# Altium PCB PCB1.PcbDoc
Units mm, origin at the board's own origin, x right, y up, seen from the top; angles counter-clockwise.
Board outline 100 x 50 mm, 2 copper layers (Top Layer, Bottom Layer); 22 components, 19 nets, 80 pads, 1 vias.
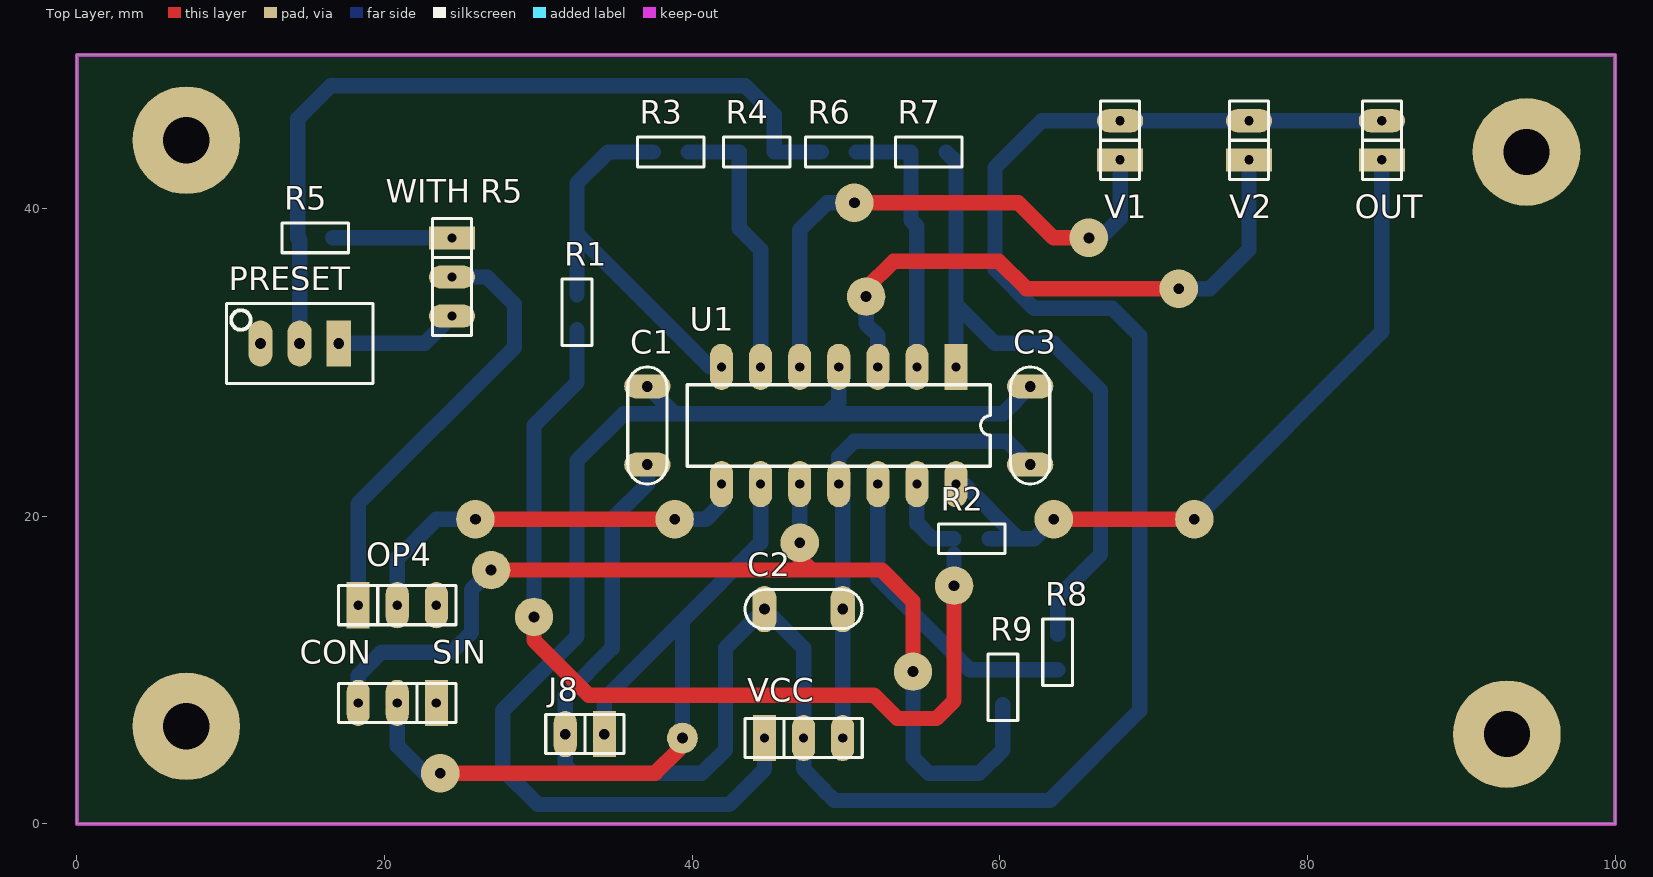
[diagram p0: Top Layer view]
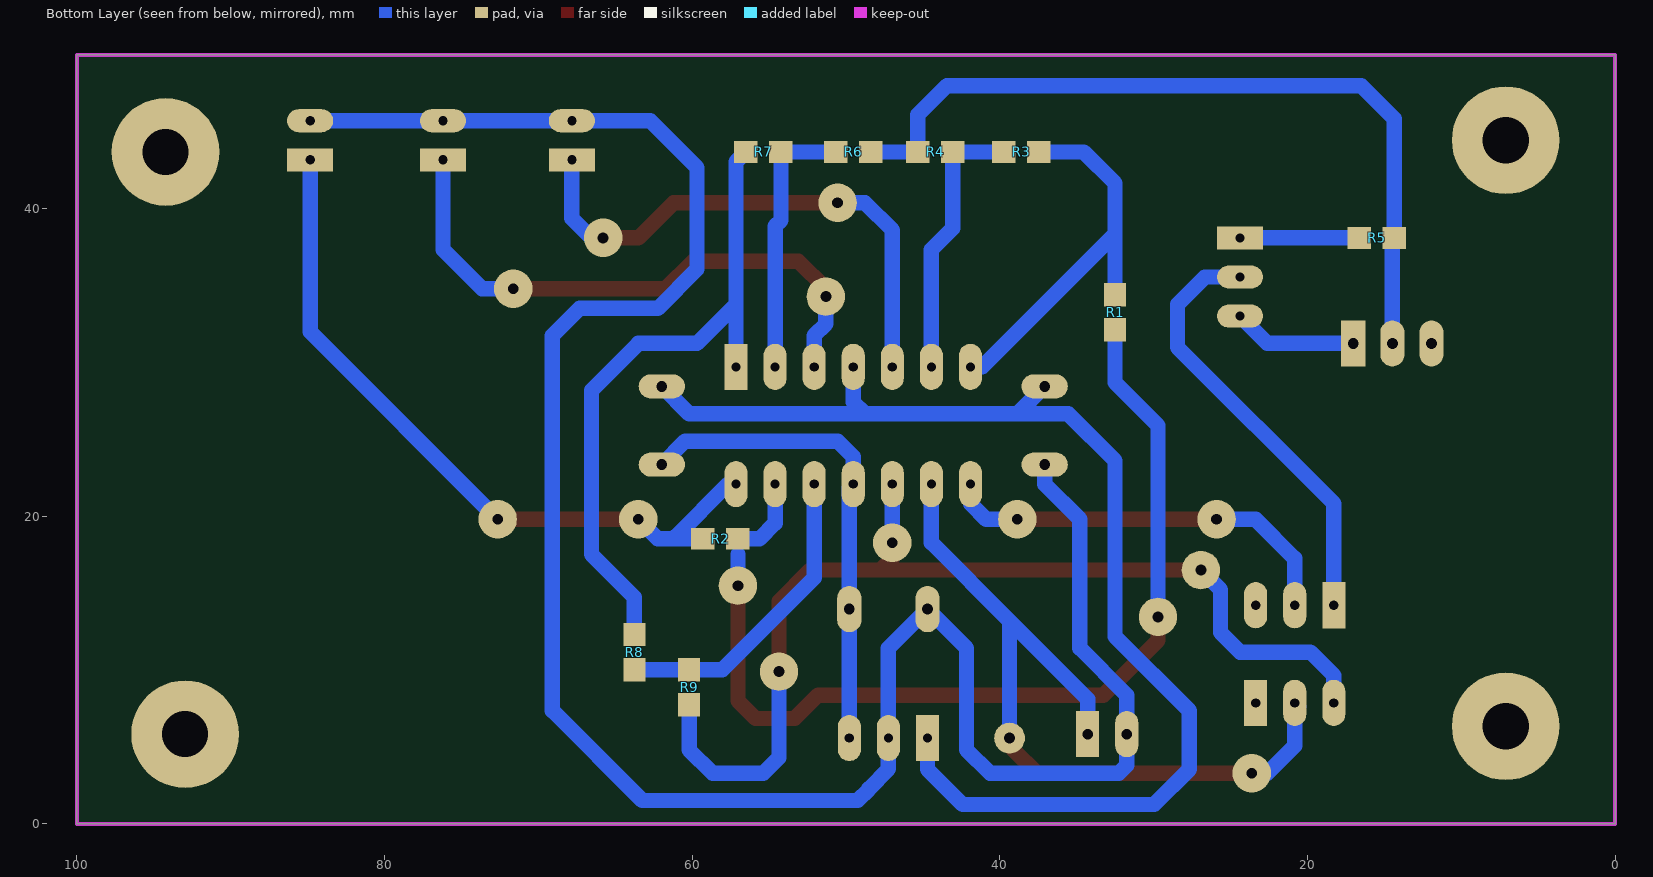
[diagram p1: Bottom Layer view, seen from below]
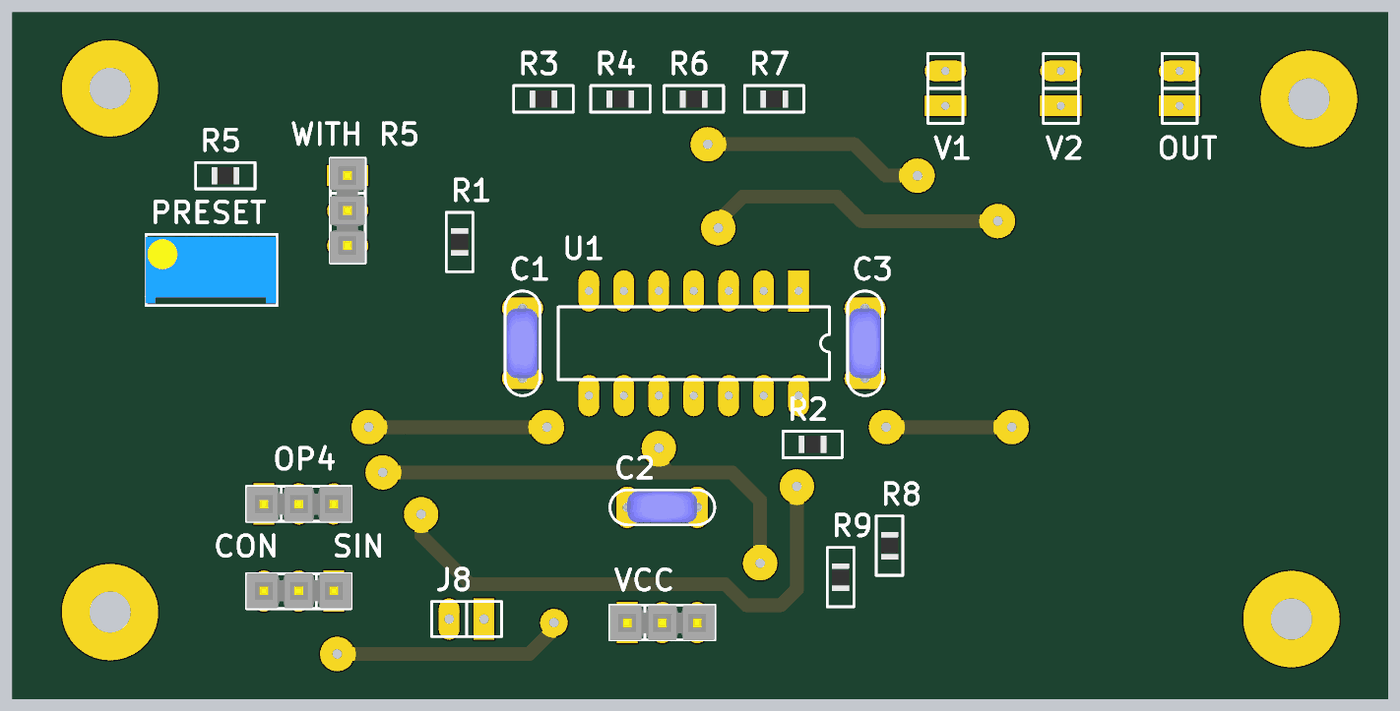
[diagram p2: 3D render of the assembled board from above, using the file's embedded part models]

## Layer stack, top to bottom
Top Solder: solder mask 0.0102, Solder Resist, Dk 3.5
Top Layer: signal copper 0.0356
Dielectric 1: dielectric 0.32, FR-4, Dk 4.8
Bottom Layer: signal copper 0.0356
Bottom Solder: solder mask 0.0102, Solder Resist, Dk 3.5

## Board outline
0,0 100,0 100,50 0,50

## Design rules (kind name [scope] priority, off if disabled: settings)
Clearance [All] p1: gap=0.254
PolygonConnect [All] p1: connectstyle=Relief reliefconductorwidth=0.254 reliefentries=4 polygonreliefangle="90 Angle" airgapwidth=0.254
RoutingVias [All] p1: holewidth=0.711 width=1.27 viastyle="Through Hole" minholewidth=0.711 minwidth=1.27 maxholewidth=0.711 maxwidth=1.27
SolderMaskExpansion [All] p1: expansion=0.102
Width [All] p1: maxlimit=1 minlimit=1 preferedwidth=1
30 further rules are at their usual default settings.

## Components (designator, comment, footprint, x,y, rotation, side; value= is the part's Value field where it differs from the comment)
C1 "CAP" CAP200 37.084,25.908 r270 top
C2 "CAP" CAP200 47.244,13.97 r180 top
C3 "CAP" CAP200 61.976,25.908 r270 top
CON "CON3" SIP3 20.828,14.224 r0 top (schematic designator J7)
J8 "CON2" SIP2#1 33.02,5.842 r180 top
OP4 "CON3" SIP3 20.828,7.874 r180 top (schematic designator J6)
OUT "CON2" SIP2#2 84.836,44.45 r90 top (schematic designator J4)
PRESET "PRESET" "PRESET V" 14.478,31.242 r180 top (schematic designator R10)
R1 "RES" 0805 32.512,33.274 r270 top
R2 "RES" 0805 58.166,18.542 r0 top
R3 "RES" 0805 38.608,43.688 r180 top
R4 "RES" 0805 44.196,43.688 r180 top
R5 "RES" 0805 15.494,38.1 r180 top
R6 "RES" 0805 49.53,43.688 r180 top
R7 "RES" 0805 55.372,43.688 r180 top
R8 "RES" 0805 63.754,11.176 r270 top
R9 "RES" 0805 60.198,8.89 r270 top
U1 "TL084ACN" 646-06 49.53,25.908 r180 top
V1 "CON2" SIP2#2 67.818,44.45 r90 top (schematic designator J2)
V2 "CON2" SIP2#2 76.2,44.45 r90 top (schematic designator J3)
VCC "CON3" SIP3 47.244,5.588 r0 top (schematic designator J1)
"WITH R5" "CON3" SIP3 24.384,35.56 r270 top (schematic designator J5)

## Footprints (in the part's own frame and the unit in brackets; to place one, negate y for a bottom-side part, rotate by r counter-clockwise, add the part's x,y. Pads: shape width x height; smd on the part's side, far side on the other; paste and mask are expansions set on the pad)
646-06 [mm] "DIP; 14 Leads; Row Spacing 7.62 mm; Pitch 2.54 mm"
  rect 1.5x3 hole 0.6: 1(-7.62,-3.81)
  oval 1.5x3 hole 0.6: 2(-5.08,-3.81) 3(-2.54,-3.81) 4(0,-3.81) 5(2.54,-3.81) 6(5.08,-3.81) 7(7.62,-3.81) 8(7.62,3.81) 9(5.08,3.81) 10(2.54,3.81) 11(0,3.81) 12(-2.54,3.81) 13(-5.08,3.81) 14(-7.62,3.81)
  silkscreen extent -9.85,-2.65 9.85,2.65
0805 [mil] "Pasivo 0805"
  rect 60x56 smd far side: 1(-45,0) 2(45,0)
  silkscreen extent -85,-38 85,38, body extent -40,-25 39,25, height 15
CAP200 [mm]
  oval 1.575x3 hole 0.7: 1(-2.54,0) 2(2.54,0)
  silkscreen extent -3.81,-1.27 3.81,1.27, body extent -2.79,-1.17 2.79,1.12, height 6.24
"PRESET V" [mm]
  rect 1.575x3 hole 0.7: 1(-2.54,0)
  oval 1.575x3 hole 0.7: 2(0,0) 3(2.54,0)
  silkscreen extent -4.76,-2.6 4.76,2.6, body extent -4.7,-2.42 4.83,2.42, height 11.55
SIP2#1 [mm]
  rect 1.5x3 hole 0.7: 1(-1.27,0)
  oval 1.5x3 hole 0.7: 2(1.27,0)
  silkscreen extent -2.54,-1.27 2.54,1.27
SIP2#2 [mm]
  rect 1.5x3 hole 0.6: 1(-1.27,0)
  oval 1.5x3 hole 0.6: 2(1.27,0)
  silkscreen extent -2.54,-1.27 2.54,1.27
SIP3 [mm]
  rect 1.5x3 hole 0.6: 1(-2.54,0)
  oval 1.5x3 hole 0.6: 2(0,0) 3(2.54,0)
  silkscreen extent -3.81,-1.27 3.81,1.27, body extent -3.81,-1.3 3.81,1.24, height 8.38

## Part data
U1: "JFET-Input Operational Amplifier"

## Free pads (board coordinates)
  round 2.5 hole 0.7: 0(50.546,40.386) 1(51.308,34.29) 2(71.628,34.798) 4(46.99,18.288) 9(63.508,19.812) 10(72.644,19.812) 13(38.862,19.812) 15(25.908,19.812) 16(25.908,19.812) 20(54.356,9.906) 22(57.023,15.494) 23(29.718,13.462) 24(26.924,16.51) 27(23.622,3.302)
  round 7 hole 3: 25(7.112,6.35) 25(7.112,44.45) 25(92.964,5.842) 25(94.234,43.688)
  round 2 hole 0.7: 26(39.37,5.588)

## Via types
v1: diameter 2.5, hole 0.711, Top Layer to Bottom Layer, 1 vias

## Nets (pads, with @x,y where several pads share a name; then routed paths per layer and width w, separated by ;. In a path a pad name is that pad's centre, name@x,y a point inside that pad or via, vN(x,y) a via of type N, cw(c..) or ccw(c..) an arc to the next point about the centre after c; other vN are vias at no path point)
+VCC: C1.1 C3.1 U1.4 VCC.1 | length 80.3
  Bottom Layer w1: C1.1 38.862,26.67 ; VCC.1 44.704,3.556 42.418,1.27 29.972,1.27 27.686,3.556 27.686,7.366 32.512,12.192 32.512,23.622 35.56,26.67 38.862,26.67 ; U1.4 49.53,27.432 48.768,26.67 ; C3.1 60.198,26.67 48.768,26.67 ; 38.862,26.67 48.768,26.67
-VCC: C2.1 C3.2 U1.11 VCC.3 | length 31.9
  Bottom Layer w1: VCC.3 C2.1 49.784,21.844 U1.11 49.53,23.876 50.546,24.892 60.452,24.892 C3.2
GND: C1.2 C2.2 J8.2 OUT.2 V1.2 V2.2 VCC.2 | length 148.4
  Bottom Layer w1: C1.2 37.084,22.098 34.798,19.812 34.798,11.43 31.75,8.382 J8.2 31.75,3.81 32.258,3.302 40.64,3.302 42.164,4.826 42.164,11.43 C2.2 47.244,11.43 VCC.2 47.244,3.587 48.514,2.286 48.514,2.254 49.244,1.524 63.246,1.524 69.088,7.366 69.088,31.75 67.31,33.528 62.23,33.528 59.69,36.068 59.69,42.672 62.738,45.72 V1.2 OUT.2
NetJ5_1: "WITH R5.1" R5.1 | length 7.7
  Bottom Layer w1: R5.1 24.384,38.1
NetJ5_3: "WITH R5.3" PRESET.1 | length 8.1
  Bottom Layer w1: PRESET.1 22.606,31.242 24.384,33.02
NetJ6_2: J8.1 OP4.2 pad.26 pad.27 U1.9 | length 51.3
  Top Layer w1: pad.27 37.592,3.302 pad.26@39.116,4.826
  Bottom Layer w1: OP4.2@20.574,7.62 OP4.2 20.828,5.08 22.606,3.302 pad.27 ; J8.1 34.29,8.128 39.37,13.208 ; pad.26@39.116,5.842 pad.26 39.37,13.208 ; U1.9 44.45,18.288 39.37,13.208
NetJ6_3: OP4.3 pad.4 pad.20 pad.24 R9.2 U1.10 | length 69
  Top Layer w1: pad.24 47.752,16.51 ; pad.4 46.99,17.272 47.752,16.51 ; pad.20 54.356,14.478 52.324,16.51 47.752,16.51
  Bottom Layer w1: OP4.3 18.288,9.652 19.812,11.176 24.384,11.176 25.654,12.446 25.654,15.24 pad.24 ; pad.4 U1.10 ; pad.20 54.356,4.318 55.372,3.302 58.674,3.302 60.198,4.826 R9.2
NetJ7_2: CON.2 pad.13 pad.15 pad.16 U1.8 | length 26.9
  Top Layer w1: pad.16 pad.13
  Bottom Layer w1: CON.2 20.828,17.272 23.368,19.812 pad.16 ; pad.13 40.894,19.812 41.91,20.828 U1.8
NetR1_1: R1.1 R3.2 U1.7 | length 26
  Bottom Layer w1: R1.1 32.512,41.656 34.544,43.688 R3.2 ; 32.512,38.354 41.148,29.718 U1.7
NetR1_2: pad.22 pad.23 R1.2 R2.1 U1.13 | length 66.4
  Top Layer w1: pad.23 29.718,11.938 33.274,8.382 51.816,8.382 53.34,6.858 55.88,6.858 57.023,8.001 pad.22
  Bottom Layer w1: pad.23@29.718,13.208 pad.23 29.718,25.908 32.512,28.702 R1.2 ; U1.13 54.61,19.558 55.626,18.542 R2.1 ; pad.22 57.023,17.526
NetR3_1: R3.1 R4.2 U1.6 | length 17.9
  Bottom Layer w1: R3.1 R4.2 43.053,38.735 44.45,37.338 U1.6
NetR4_1: PRESET.2 R4.1 R5.2 R6.2 | length 52.8
  Bottom Layer w1: PRESET.2 14.478,37.973 R5.2 14.351,45.847 16.51,48.006 43.434,48.006 45.339,46.101 R4.1 R6.2
NetR6_1: R6.1 R7.2 U1.2 | length 17.7
  Bottom Layer w1: R6.1 R7.2 54.229,39.243 54.61,38.862 U1.2
NetR7_1: R7.1 R8.1 U1.1 | length 43
  Bottom Layer w1: R7.1 57.15,43.053 57.15,33.782 ; U1.1 57.15,33.782 ; R8.1 63.754,14.732 66.548,17.526 66.548,28.194 63.5,31.242 59.69,31.242 57.15,33.782
NetR8_2: R8.2 R9.1 U1.12 | length 20.3
  Bottom Layer w1: U1.12 52.07,16.002 58.039,10.033 R9.1 R8.2
OUT: OUT.1 pad.9 pad.10 R2.2 U1.14 | length 47.6
  Top Layer w1: pad.9 pad.10
  Bottom Layer w1: U1.14 57.658,22.098 61.091,18.665 ; R2.2 62.23,18.542 62.234,18.538 pad.9 ; pad.10 84.836,32.004 OUT.1
V1: pad.0 U1.5 V1.1 | length 35.7
  Top Layer w1: pad.0 61.214,40.386 63.5,38.1 v1(65.786,38.1)
  Bottom Layer w1: U1.5 46.99,38.608 48.768,40.386 pad.0 ; v1@66.04,37.592 67.818,39.37 V1.1
V2: pad.1 pad.2 U1.3 V2.1 | length 38.7
  Top Layer w1: pad.1 51.308,34.798 53.086,36.576 59.944,36.576 61.722,34.798 pad.2
  Bottom Layer w1: pad.1 51.308,32.512 52.07,31.75 U1.3 ; pad.2 73.66,34.798 76.2,37.338 V2.1
VFEED: "WITH R5.2" CON.1 | length 28.6
  Bottom Layer w1: CON.1 18.288,20.828 28.448,30.988 28.448,33.782 26.67,35.56 24.384,35.56
pads on no net: CON.3 OP4.1 PRESET.3

## Keep-outs
Keep-Out Layer:
  the board outline again, w0.254

## Silkscreen, mask and mechanical layers (free items; w line width, h text height)
Top Overlay:
  text "SIN" at 23.114,10.414 h1.52